# Allegro board BOOM-MCU_01v1.brd
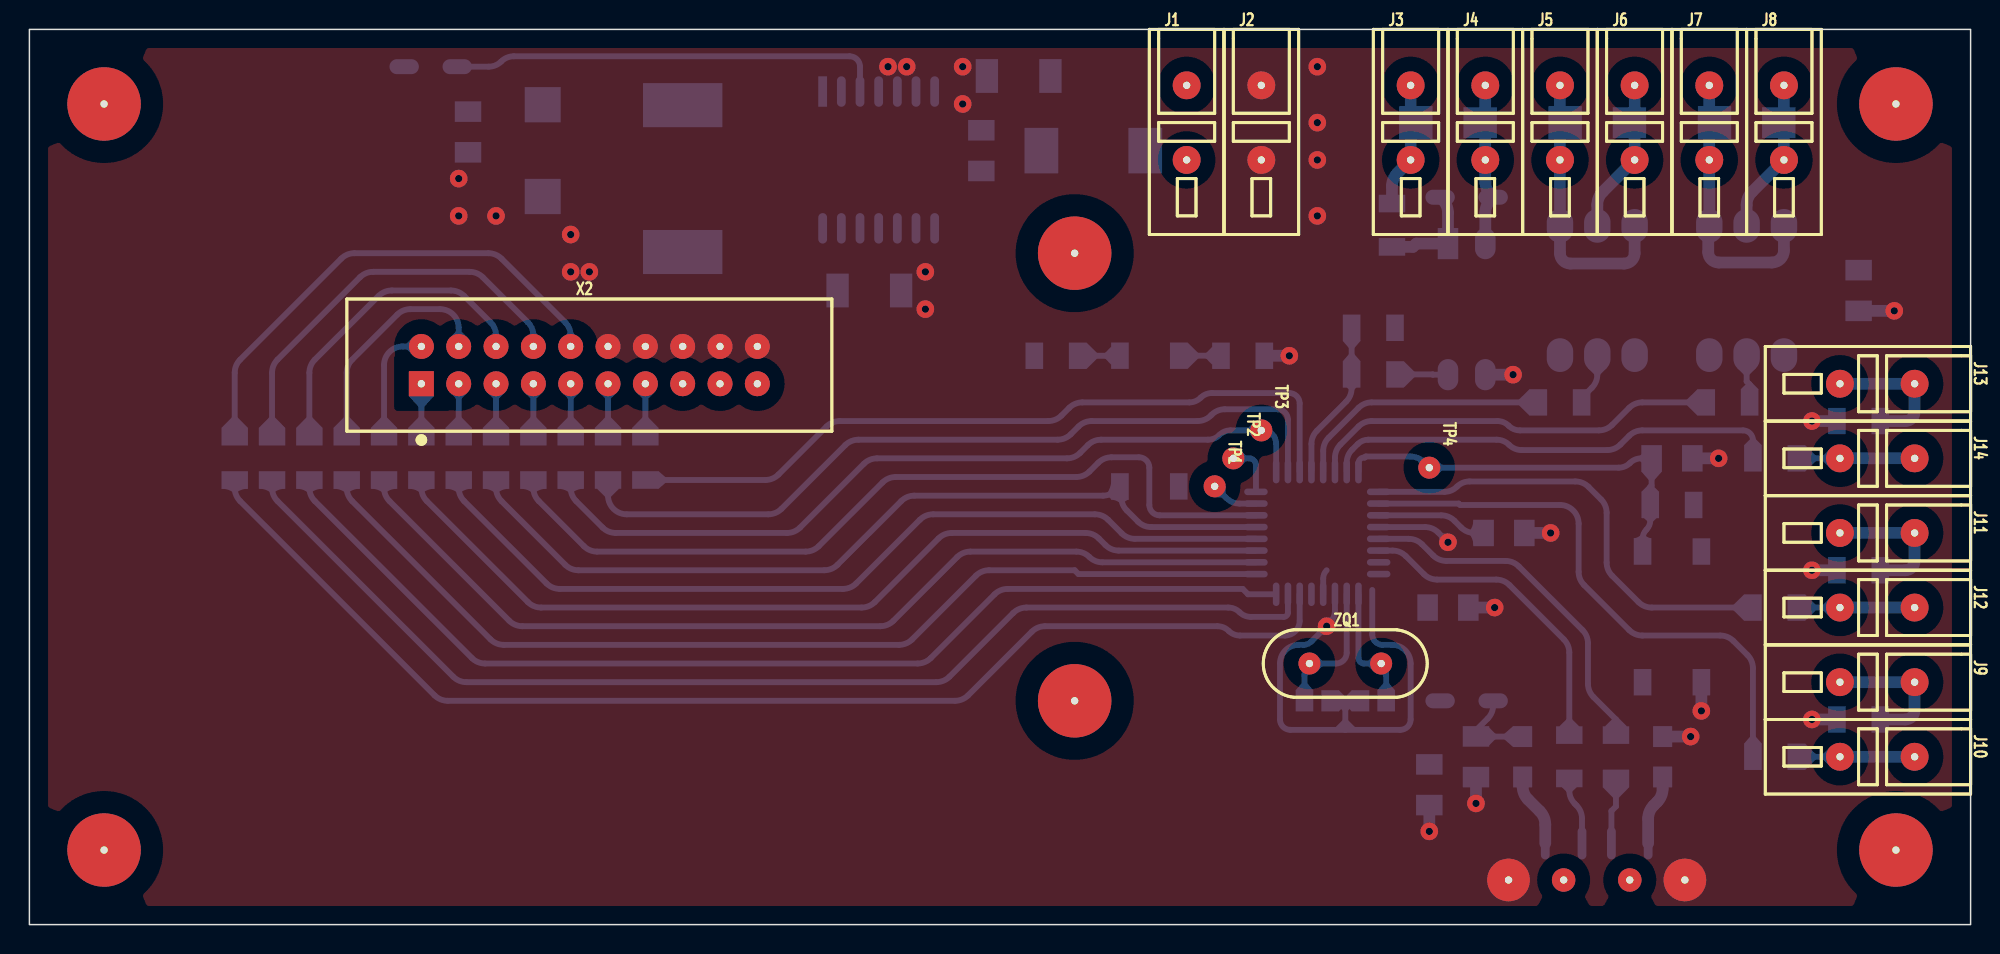
[diagram p0: board, top side]
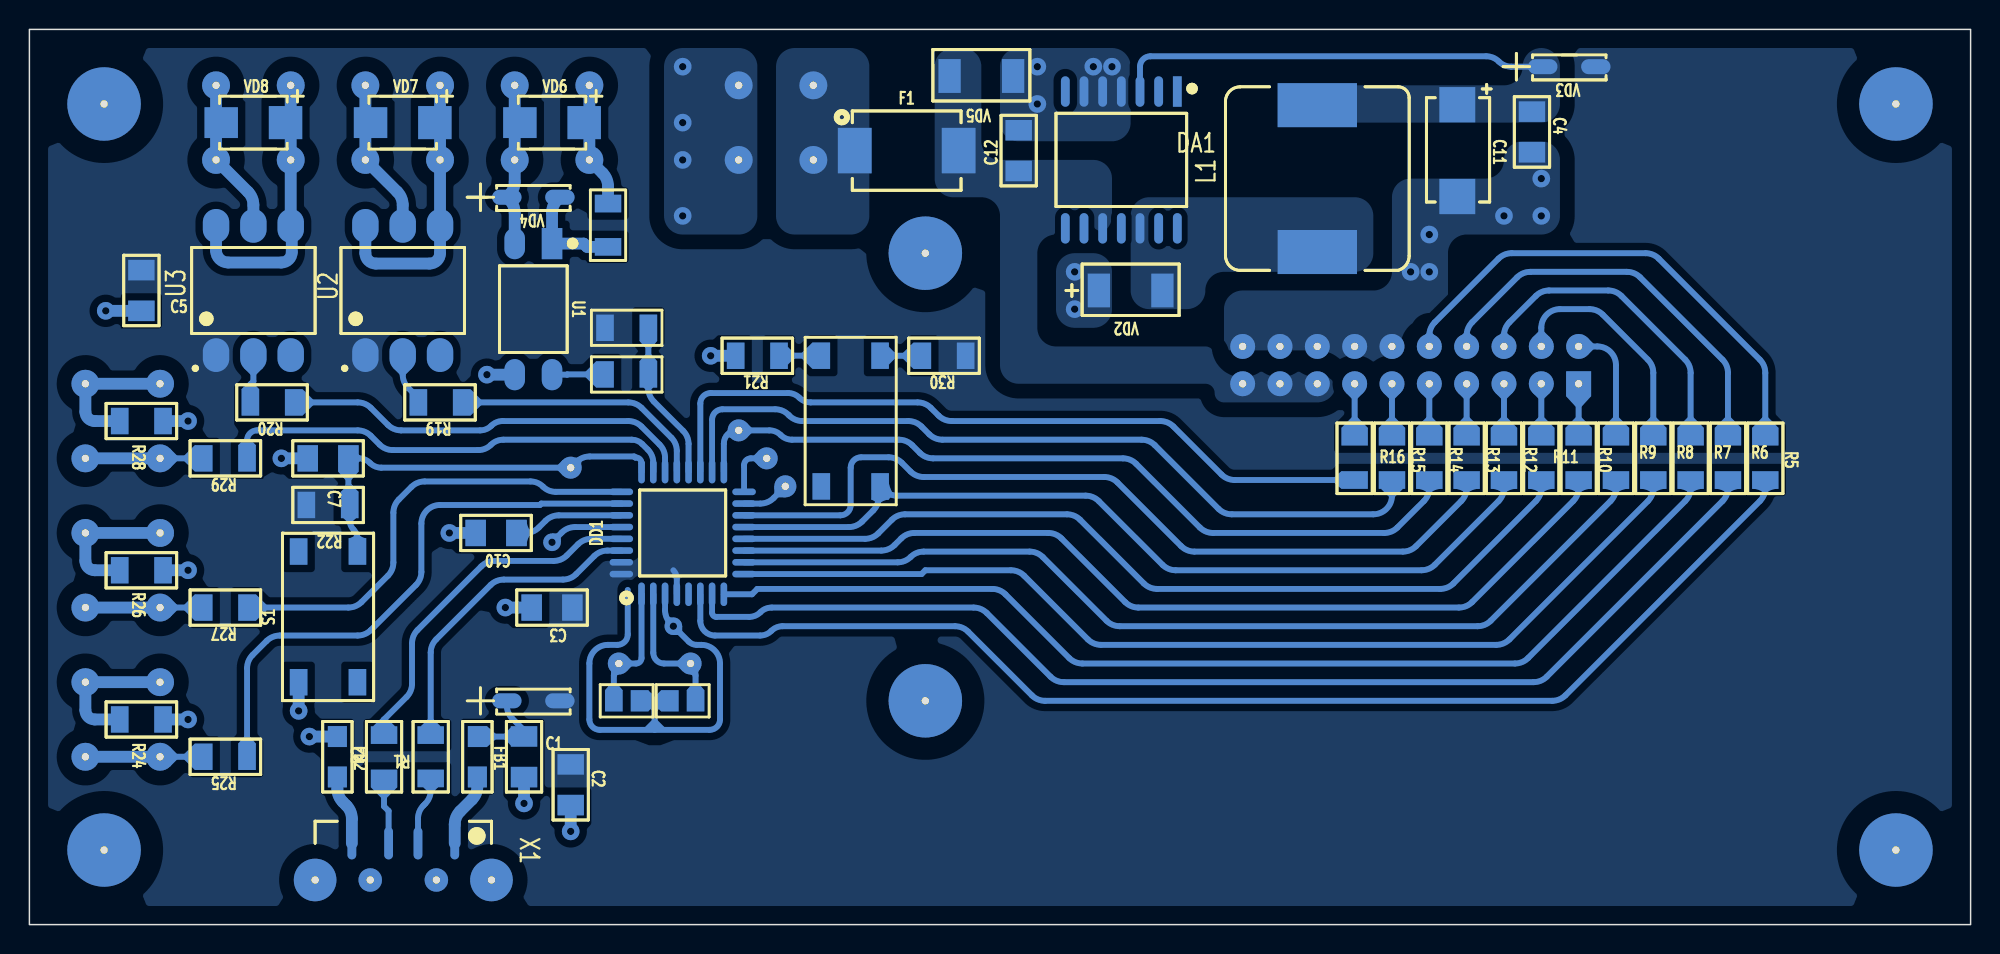
[diagram p1: board, bottom side, seen from below]

Outline 132.08 x 60.96 mm; copper layers: TOP, BOTTOM. Coordinates in mm from the lower left corner of the outline.
Outline path: rectangle 0,0 132.08,60.96

## Placement (name value [footprint] x y rotation side)
C1  0.1uF  [CAPC3216X110N]  98.43 11.43 270 bottom
C2  10uF  [CAPC3216X110N]  95.25 9.53 270 bottom
C3  0.1uF  [CAPC3216X110N]  96.52 21.59 0 bottom
C4  0.1uF  [CAPC3216X110N]  29.85 53.98 270 bottom
C5  0.1uF  [CAPC3216X110N]  124.46 43.18 270 bottom
C7  0.1uF  [CAPC3216X110N]  111.76 31.75 0 bottom
C8  22pF  [CAPC2012X130N]  87.63 15.24 0 bottom
C9  22pF  [CAPC2012X130N]  91.44 15.24 180 bottom
C10  1uF  [CAPC3216X110N]  100.33 26.67 0 bottom
C11  220uF x 10B  [CAPMP7343X400N]  34.93 52.7 270 bottom
C12  1uF  [CAPC3216X110N]  64.77 52.7 90 bottom
DA1  LM2574M-5.0  [SOIC127P1032X265-14N]  58.42 52.07 270 bottom
DD1  AT90USB162-16AU  [QFP80P900X900X120-32N]  87.63 26.67 90 bottom
F1  MF-SM75/60  [FUSM7354X320N]  72.39 52.7 180 bottom
FB1  BLM31PG601SN1  [INDC3211X160N]  101.6 11.43 270 bottom
FB2  BLM31PG601SN1  [INDC3211X160N]  111.12 11.43 270 bottom
J1  WAGO236-744  [WAGO_236]  78.74 57.15 0 top
J2  WAGO236-401  [WAGO_236]  83.82 57.15 0 top
J3  WAGO236-401  [WAGO_236]  93.98 57.15 0 top
J4  WAGO236-401  [WAGO_236]  99.06 57.15 0 top
J5  WAGO236-401  [WAGO_236]  104.14 57.15 0 top
J6  WAGO236-401  [WAGO_236]  109.22 57.15 0 top
J7  WAGO236-401  [WAGO_236]  114.3 57.15 0 top
J8  WAGO236-401  [WAGO_236]  119.38 57.15 0 top
J9  WAGO236-401  [WAGO_236]  128.27 16.51 270 top
J10  WAGO236-401  [WAGO_236]  128.27 11.43 270 top
J11  WAGO236-401  [WAGO_236]  128.27 26.67 270 top
J12  WAGO236-401  [WAGO_236]  128.27 21.59 270 top
J13  WAGO236-401  [WAGO_236]  128.27 36.83 270 top
J14  WAGO236-401  [WAGO_236]  128.27 31.75 270 top
L1  330uH 0.95A  [INDC12501250X800N]  44.45 50.8 90 bottom
NOREF  -  [unnamed]  5.08 5.08 0 top
NOREF#2  -  [unnamed]  127 55.88 0 top
NOREF#3  -  [unnamed]  71.12 15.24 0 top
NOREF#4  -  [unnamed]  71.12 45.72 0 top
NOREF#5  -  [unnamed]  5.08 55.88 0 top
NOREF#6  -  [unnamed]  127 5.08 0 top
R1  24  [RESC3216X50N]  104.78 11.43 90 bottom
R2  24  [RESC3216X50N]  107.95 11.43 90 bottom
R5  100  [RESC3216X50N]  13.97 31.75 270 bottom
R6  100  [RESC3216X50N]  16.51 31.75 270 bottom
R7  100  [RESC3216X50N]  19.05 31.75 270 bottom
R8  100  [RESC3216X50N]  21.59 31.75 270 bottom
R9  100  [RESC3216X50N]  24.13 31.75 270 bottom
R10  100  [RESC3216X50N]  26.67 31.75 270 bottom
R11  100  [RESC3216X50N]  29.21 31.75 270 bottom
R12  100  [RESC3216X50N]  31.75 31.75 270 bottom
R13  100  [RESC3216X50N]  34.29 31.75 270 bottom
R14  100  [RESC3216X50N]  36.83 31.75 270 bottom
R15  100  [RESC3216X50N]  39.37 31.75 270 bottom
R16  100  [RESC3216X50N]  41.91 31.75 270 bottom
R17  1k  [RESC3216X50N]  92.71 47.62 270 bottom
R18  100  [RESC3216X50N]  91.44 37.47 180 bottom
R19  510  [RESC3216X50N]  104.14 35.56 0 bottom
R20  510  [RESC3216X50N]  115.57 35.56 0 bottom
R21  1k  [RESC3216X50N]  82.55 38.73 0 bottom
R22  10k  [RESC3216X50N]  111.76 28.57 0 bottom
R23  10k  [RESC3216X50N]  91.44 40.64 0 bottom
R24  1k  [RESC3216X50N]  124.46 13.97 0 bottom
R25  1k  [RESC3216X50N]  118.75 11.43 0 bottom
R26  1k  [RESC3216X50N]  124.46 24.13 0 bottom
R27  1k  [RESC3216X50N]  118.75 21.59 0 bottom
R28  1k  [RESC3216X50N]  124.46 34.29 0 bottom
R29  1k  [RESC3216X50N]  118.75 31.75 0 bottom
R30  10k  [RESC3216X50N]  69.85 38.73 0 bottom
S1  DTSMW-2.0S  [SW_DTSMW-2_0N]  111.76 20.95 90 bottom
S2  DTSMW-2.0S  [SW_DTSMW-2_0N]  76.2 34.29 90 bottom
TP1  TP  [KP_W150H100]  80.65 29.84 270 top
TP2  TP  [KP_W150H100]  81.92 31.75 270 top
TP3  TP  [KP_W150H100]  83.82 33.66 270 top
TP4  TP  [KP_W150H100]  95.25 31.12 270 top
U1  HCPL-817-300E  [SOIC254P1000X350-4N]  97.79 41.91 270 bottom
U2  G3VM-351E  [SOIC254P978X342-6M]  106.68 43.18 90 bottom
U3  G3VM-351E  [SOIC254P978X342-6M]  116.84 43.18 90 bottom
VD1  MBR0540  [SOT95P375X128-2N]  97.79 15.24 0 bottom
VD2  STPS160U  [DIOM5336X265N]  57.15 43.18 0 bottom
VD3  MBR0540  [SOT95P375X128-2N]  27.31 58.42 0 bottom
VD4  MBR0540  [SOT95P375X128-2N]  97.79 49.53 0 bottom
VD5  SM6T30CA  [DIOM5336X265N_V1]  67.31 57.78 0 bottom
VD6  P6SMB300CA  [DIOM5436X230N]  96.52 54.61 180 bottom
VD7  P6SMB300CA  [DIOM5436X230N]  106.68 54.61 180 bottom
VD8  P6SMB300CA  [DIOM5436X230N]  116.84 54.61 180 bottom
X1  USB A 18 SMT  [CON_USB_A_MALE_SMD]  106.64 6.04 270 bottom
X2  PBD-20  [SHD0S254P10X2_3300X900X900]  26.67 36.83 0 top
ZQ1  16000kHz  [OSCW43P488L1100H350Q2]  89.54 17.78 0 top

## Library data of the parts
C1-C5 C7-C10 C12 = CAPACITOR
C11 = CAPACITOR_POL
DA1 = LM2574HVM-5_0.0
DD1 = AT90USB162_6
F1 = EFUSE
FB1 FB2 L1 = INDUCTOR
J1-J14 = CONN2_1
R1 R2 R5-R30 = R_0.25W
S1 S2 = SW_PUSHBTN
TP1-TP4 = TP
U1 = HCPL181_v1_0
U2 U3 = PVT412_0
VD1-VD4 = SHOTTKY
VD5-VD8 = SUPRESSOR
X1 = USB A 18 SMT_0
X2 = CONN20_12
ZQ1 = XTAL

## Footprints (pads in the part's own frame, mm; a bottom-side part is the same pattern mirrored in y, then rotated)
CAPC2012X130N
  rect 1.2x1.45 smd: 1(-0.875,0) 2(0.875,0)
CAPC3216X110N
  rect 1.4x1.8 smd: 1(-1.385,0) 2(1.385,0)
CAPMP7343X400N
  rect 2.4x2.45 smd: 1(-3.125,0) 2(3.125,0)
CON_USB_A_MALE_SMD
  round 1.6 hole 0.5: (3,-2.25) (3,2.25)
  oval 2.2x0.6 smd: 1(0.5,3.5) 2(0.5,1) 3(0.5,-1) 4(0.5,-3.5)
  round 2.9 hole 0.5: 5(3,-6) 6(3,6)
DIOM5336X265N
  rect 1.52x2.3 smd: 1(-2.162,0) 2(2.162,0)
DIOM5336X265N_V1
  rect 1.52x2.3 smd: 1(-2.162,0) 2(2.162,0)
DIOM5436X230N
  rect 2.275x2.1 smd: 1(-2.188,0)
  rect 2.275x2.25 smd: 2(2.188,0)
FUSM7354X320N
  rect 2.3x3.1 smd: 1(-3.535,0) 2(3.535,0)
INDC3211X160N
  rect 1.425x1.3 smd: 1(-1.375,0) 2(1.375,0)
INDC12501250X800N
  rect 3x5.4 smd: 1(-5,0) 2(5,0)
KP_W150H100
  round 1.5 hole 0.5: 1(0,0)
OSCW43P488L1100H350Q2
  round 1.5 hole 0.5: 1(-2.44,0) 2(2.44,0)
QFP80P900X900X120-32N
  oval 1.6x0.45 smd: 1(-4.175,2.8) 2(-4.175,2) 3(-4.175,1.2) 4(-4.175,0.4) 5(-4.175,-0.4) 6(-4.175,-1.2) 7(-4.175,-2) 8(-4.175,-2.8) 17(4.175,-2.8) 18(4.175,-2) 19(4.175,-1.2) 20(4.175,-0.4) 21(4.175,0.4) 22(4.175,1.2) 23(4.175,2) 24(4.175,2.8)
  oval 0.45x1.6 smd: 9(-2.8,-4.175) 10(-2,-4.175) 11(-1.2,-4.175) 12(-0.4,-4.175) 13(0.4,-4.175) 14(1.2,-4.175) 15(2,-4.175) 16(2.8,-4.175) 25(2.8,4.175) 26(2,4.175) 27(1.2,4.175) 28(0.4,4.175) 29(-0.4,4.175) 30(-1.2,4.175) 31(-2,4.175) 32(-2.8,4.175)
RESC3216X50N
  rect 1.2x1.8 smd: 1(-1.475,0) 2(1.475,0)
SHD0S254P10X2_3300X900X900
  rect 1.7x1.7 hole 0.5: 1(0,0)
  round 1.7 hole 0.5: 2(0,2.54) 3(2.54,0) 4(2.54,2.54) 5(5.08,0) 6(5.08,2.54) 7(7.62,0) 8(7.62,2.54) 9(10.16,0) 10(10.16,2.54) 11(12.7,0) 12(12.7,2.54) 13(15.24,0) 14(15.24,2.54) 15(17.78,0) 16(17.78,2.54) 17(20.32,0) 18(20.32,2.54) 19(22.86,0) 20(22.86,2.54)
SOIC127P1032X265-14N
  rect 2.075x0.6 smd: 1(-4.658,4.445)
  oval 2.075x0.6 smd: 2(-4.658,3.175) 3(-4.658,1.905) 4(-4.658,0.635) 5(-4.658,-0.635) 6(-4.658,-1.905) 7(-4.658,-3.175) 8(4.658,-3.175) 9(4.658,-1.905) 10(4.658,-0.635) 11(4.658,0.635) 12(4.658,1.905) 13(4.658,3.175) 14(4.658,4.445)
SOIC254P978X342-6M
  oval 2.3x1.8 smd: 1(-4.4,2.54) 2(-4.4,0) 3(-4.4,-2.54) 4(4.4,-2.54) 5(4.4,0) 6(4.4,2.54)
SOIC254P1000X350-4N
  rect 2.125x1.4 smd: 1(-4.462,1.27)
  oval 2.125x1.4 smd: 2(-4.462,-1.27) 3(4.462,-1.27) 4(4.462,1.27)
SOT95P375X128-2N
  oval 2x1.02 smd: 1(-1.805,0) 2(1.805,0)
SW_DTSMW-2_0N
  rect 1.8x1.2 smd: 1(-4.45,-2) 2(4.45,-2) 3(4.45,2) 4(-4.45,2)
unnamed
  round 5 hole 0.5: 1(0,0)
WAGO_236
  round 1.9 hole 0.5: 1(0,0) 2(0,-5.08)

## Nets
GND: C1.2 C2.2 C3.2 C4.2 C5.2 C7.2 C8.2 C9.2 C10.2 C11.2 C12.2 DA1.4(SGND) DA1.5(O\N\/OFF) DA1.6(PGND) DD1.3(GND) DD1.28(UGND) FB2.1 J2.1(PIN1) J2.2(PIN2) R21.2 R24.1 R26.1 R28.1 S1.4 U1.3(EMITTER) VD2.2(ANODE) VD5.1(ANODE) X1.5(SHLD) X1.6(SHLD1) X2.12(GND#12) X2.14(GND#14) X2.16(GND#16) X2.18(GND#18) X2.20(GND#20)
#RES: C7.1 DD1.24(R\E\S\E\T\/PC1/DW) R22.1 S1.2 TP4.1
+5B: C2.1 C3.1 C5.1 DD1.4(VCC) DD1.31(UVCC) DD1.32(AVCC) R22.2 R23.2 R30.1 U2.1(ANODE) U3.1(ANODE) VD1.1(CATHODE) VD3.1(CATHODE)
+5B_USB: C1.1 FB1.1 VD1.2(ANODE)
+12B: C12.1 DA1.10(VIN) F1.2 VD5.2(CATHODE) X2.15(+12B#15) X2.17(+12B#17) X2.19(+12B#19)
A: DD1.8(RXD1/AIN1/INT2/PD2) R7.2
B: DD1.7(AIN0/INT1/PD1) R6.2
BOOM: DD1.21(PB7/PCINT7/OC.0A/OC.1C) R19.1
C: DD1.13(\C\T\S\/\H\W\B\/T0/INT7/PD7) R12.2 S2.1
D: DD1.12(\R\T\S\/INT6/PD6) R11.2
D+: DD1.29(D+/SCK) R2.2
D-: DD1.30(D-/SDATA) R1.2
DEFUSE: DD1.22(PC7/INT4/ICP1/CLKO) R20.1
DIG1: DD1.14(\S\S\/PCINT0/PB0) R13.2
DIG3: DD1.18(PB4/T1/PCINT4) R15.2
DIG4: DD1.19(PB5/PCINT5) R16.2
DP: DD1.6(OC.0B/INT0/PD0) R5.2
E: DD1.11(XCK/PCINT12/PD5) R10.2
F: DD1.9(TXD1/INT3/PD3) R8.2
G: DD1.10(INT5/PD4) R9.2
MISO/DIG2: DD1.17(PB3/PDO/MISO/PCINT3) R14.2 TP3.1
MOSI: DD1.15(SCLK/PCINT1/PB1) TP1.1
SCLK: DD1.16(PDI/MOSI/PCINT2/PB2) TP2.1
START: DD1.20(PB6/PCINT6) R18.2 R23.1
WIRE1: DD1.26(PC4/PCINT10) R25.1
WIRE2: DD1.25(PC5/PCINT9/OC.1B) R27.1
WIRE3: DD1.23(PC6/OC.1A/PCINT8) R29.1
N439682: FB2.2 X1.4(GND)
N439688: FB1.2 X1.1(VBUS)
N439904: R2.1 X1.3(D+)
N439914: R1.1 X1.2(D-)
N441096: C10.1 DD1.27(UCAP)
N443077: R12.1 X2.5(C)
N443081: R11.1 X2.3(D)
N443094: R10.1 X2.1(E)
N443107: R9.1 X2.2(G)
N443119: R8.1 X2.4(F)
N443131: R7.1 X2.6(A)
N443143: R6.1 X2.8(B)
N444919: R5.1 X2.10(DP)
N445591: R16.1 X2.13(DIG4)
N445610: R15.1 X2.11(DIG3)
N445622: R14.1 X2.9(DIG2)
N446825: C4.1 C11.1 DA1.3(FB) L1.2 VD3.2(ANODE)
N447843: DA1.12(VOUT) L1.1 VD2.1(CATHODE)
N450977: R17.2 U1.1(ANODE) VD4.1(CATHODE)
N451042: J4.1(PIN1) J4.2(PIN2) U1.2(CATHODE) VD4.2(ANODE) VD6.1(ANODE)
N451474: J3.1(PIN1) J3.2(PIN2) R17.1 VD6.2(CATHODE)
N451518: R18.1 U1.4(COLLECTOR)
N452612: J8.1(PIN1) J8.2(PIN2) U3.5(SOURCE) VD8.1(ANODE)
N452841: R20.2 U3.2(CATHODE)
N462128: J9.1(PIN1) J9.2(PIN2) R24.2
N462776: J11.1(PIN1) J11.2(PIN2) R26.2
N462976: J13.1(PIN1) J13.2(PIN2) R28.2
N464057: J10.1(PIN1) J10.2(PIN2) R25.2
N464124: J12.1(PIN1) J12.2(PIN2) R27.2
N464128: J14.1(PIN1) J14.2(PIN2) R29.2
N467678: R30.2 S2.2
N467714: R21.1 S2.3
N470630: C9.1 DD1.1(XTAL1) ZQ1.2
N470646: C8.1 DD1.2(PC0/XTAL2) ZQ1.1
N473598: R13.1 X2.7(DIG1)
N475101: J5.1(PIN1) J5.2(PIN2) U2.4(DRAIN1) U2.6(DRAIN2) VD7.2(CATHODE)
N475105: J6.1(PIN1) J6.2(PIN2) U2.5(SOURCE) VD7.1(ANODE)
N475141: R19.2 U2.2(CATHODE)
N479390: F1.1 J1.1(PIN1) J1.2(PIN2)
N481359: J7.1(PIN1) J7.2(PIN2) U3.4(DRAIN1) U3.6(DRAIN2) VD8.2(CATHODE)

Pads without a net: DA1 1 2 7 8 9 11 13 14; DD1 5; NOREF 1; NOREF#2 1; NOREF#3 1; NOREF#4 1; NOREF#5 1; NOREF#6 1; S1 1 3; S2 4; U2 3; U3 3

## Via types
v1: diameter 1.2, hole 0.5, TOP to BOTTOM, 31 vias

## Routing (per net, layer and track width the routed paths; a pad name or vN(x,y) marks a point on that pad's centre or on a via; arc(x,y) is an arc through that point)
GND: length 63.9
  BOTTOM w0.4: 91.37,22.79 91.37,19.76 arc(91.58,19.26) 92.08,19.05 92.71,19.05 arc(93.61,18.68) 93.98,17.78 93.98,13.97 arc(93.77,13.47) 93.27,13.26 89.54,13.26 ; 89.54,13.26 85.8,13.26 arc(85.3,13.47) 85.09,13.97 85.09,17.78 arc(85.46,18.68) 86.36,19.05 86.68,19.05 arc(86.97,19.11) 87.22,19.27 v1(88.27,20.32) 88.46,20.51 arc(88.73,20.92) 88.83,21.41 DD1.3 ; 89.54,13.26 89.54,15.24 ; C8.2 89.54,15.24 ; 89.54,15.24 C9.2 ; v1(96.52,26.04) 95.86,26.7 arc(95.45,26.97) 94.96,27.07 DD1.28
  BOTTOM w0.8: S1.4 v1(113.76,14.55) ; C2.2 v1(95.25,6.35) ; R26.1 v1(121.28,24.13) ; U1.3 v1(100.95,37.45) ; C10.2 v1(103.51,26.67) ; FB2.1 v1(113.03,12.8) ; 97.91,21.59 v1(99.7,21.59) ; 84.03,38.73 v1(85.73,38.73) ; R24.1 v1(121.28,13.97) ; R28.1 v1(121.28,34.29) ; C1.2 v1(98.43,8.25) ; C5.2 v1(126.89,41.8) ; C7.2 v1(114.94,31.75)
  vias: v1(29.21,50.8) v1(29.21,48.26) v1(31.75,48.26) v1(36.83,46.99) v1(36.83,44.45) v1(38.1,44.45) v1(58.42,58.42) v1(59.69,58.42) v1(60.96,44.45) v1(60.96,41.91) v1(63.5,58.42) v1(63.5,55.88) v1(87.63,58.42) v1(87.63,54.61) v1(87.63,52.07) v1(87.63,48.26)
#RES: length 27.7
  BOTTOM w0.4: DD1.24 90.43,31.42 arc(90.54,31.7) 90.82,31.81 90.87,31.81 90.93,31.88 93.96,31.88 arc(94.45,31.78) 94.86,31.5 TP4.1 108.14,31.12 arc(108.55,31.2) 108.9,31.43 arc(109.25,31.67) 109.67,31.75 C7.1 110.38,29.89 110.28,29.8 R22.1 110.28,27.53 arc(110.22,27.18) 110.02,26.89 arc(109.83,26.6) 109.76,26.26 S1.2
+5B: length 1.7
  BOTTOM w0.4: DD1.4 88.03,23.56 arc(88.09,23.87) 88.27,24.13
+5B_USB: length 6
  BOTTOM w0.4: FB1.1 99.66,12.8 99.65,12.82 C1.1 98.43,13.23 99.22,14.03 arc(99.5,14.44) 99.59,14.93 VD1.2
A: length 73.6
  BOTTOM w0.4: DD1.8 82.92,22.5 82.55,22.86 66.57,22.86 arc(66.08,22.76) 65.67,22.49 61.33,18.15 arc(60.92,17.88) 60.43,17.78 31.01,17.78 arc(30.52,17.88) 30.11,18.15 19.42,28.84 arc(19.15,29.25) 19.05,29.74 19.05,30.28
B: length 78.9
  BOTTOM w0.4: DD1.7 85.63,21.25 arc(85.55,21.04) 85.34,20.95 83.11,20.95 arc(82.69,21.04) 82.34,21.27 arc(81.99,21.51) 81.58,21.59 67.84,21.59 arc(67.35,21.49) 66.94,21.22 62.6,16.88 arc(62.19,16.61) 61.7,16.51 29.74,16.51 arc(29.25,16.61) 28.84,16.88 16.88,28.84 arc(16.61,29.25) 16.51,29.74 16.51,30.28
BOOM: length 17.6
  BOTTOM w0.4: R19.1 91.33,35.56 arc(90.85,35.46) 90.43,35.19 88.4,33.16 arc(88.13,32.75) 88.03,32.26 DD1.21
C: length 58.7
  BOTTOM w0.4: DD1.13 76.33,27.07 arc(75.84,27.17) 75.43,27.44 74.67,28.2 arc(74.39,28.61) 74.3,29.1 74.3,29.75 S2.1 73.94,29.58 arc(73.53,29.31) 73.04,29.21 60.22,29.21 arc(59.73,29.11) 59.32,28.84 54.98,24.5 arc(54.57,24.23) 54.08,24.13 37.36,24.13 arc(36.87,24.23) 36.46,24.5 32.12,28.84 arc(31.85,29.25) 31.75,29.74 31.75,30.28
D: length 60.4
  BOTTOM w0.4: DD1.12 75.22,26.27 arc(74.73,26.37) 74.32,26.64 73.4,27.57 arc(72.98,27.84) 72.5,27.94 61.49,27.94 arc(61,27.84) 60.59,27.57 56.25,23.23 arc(55.84,22.96) 55.35,22.86 36.09,22.86 arc(35.6,22.96) 35.19,23.23 29.58,28.84 arc(29.31,29.25) 29.21,29.74 29.21,30.28
D+: length 24.3
  BOTTOM w0.4: DD1.29 93.85,26.27 arc(94.34,26.17) 94.75,25.9 95.51,25.14 arc(95.92,24.86) 96.41,24.77 100.44,24.77 arc(100.92,24.67) 101.34,24.39 105.67,20.06 arc(105.95,19.65) 106.05,19.16 106.05,16.4 arc(106.14,15.92) 106.42,15.5 107.95,13.97 R2.2
D-: length 21.6
  BOTTOM w0.4: R1.2 104.78,18.52 arc(104.68,19.01) 104.4,19.42 100.7,23.12 arc(100.29,23.4) 99.8,23.5 95.78,23.5 arc(95.29,23.59) 94.88,23.87 93.65,25.1 arc(93.23,25.37) 92.75,25.47 DD1.30
DEFUSE: length 28.3
  BOTTOM w0.4: DD1.22 88.83,31.79 arc(88.93,32.28) 89.2,32.69 90.43,33.92 arc(90.85,34.19) 91.33,34.29 99.88,34.29 arc(100.3,34.21) 100.65,33.97 arc(101,33.74) 101.41,33.66 106.79,33.66 arc(107.28,33.75) 107.69,34.03 108.85,35.19 arc(109.26,35.46) 109.75,35.56 R20.1
DIG1: length 57.5
  BOTTOM w0.4: DD1.14 76.91,27.87 arc(76.41,28.08) 76.2,28.57 76.2,31.12 arc(75.99,31.61) 75.49,31.82 73.62,31.82 arc(73.14,31.73) 72.73,31.45 72.13,30.85 arc(71.72,30.58) 71.23,30.48 58.95,30.48 arc(58.46,30.38) 58.05,30.11 53.71,25.77 arc(53.3,25.5) 52.81,25.4 38.63,25.4 arc(38.14,25.5) 37.73,25.77 34.66,28.84 arc(34.39,29.25) 34.29,29.74 34.29,30.28
DIG3: length 54.6
  BOTTOM w0.4: 39.37,30.28 39.37,29.21 arc(39.74,28.31) 40.64,27.94 50.27,27.94 arc(50.76,28.04) 51.17,28.31 55.51,32.65 arc(55.92,32.92) 56.41,33.02 69.96,33.02 arc(70.44,33.12) 70.86,33.39 71.38,33.92 arc(71.79,34.19) 72.28,34.29 79.48,34.29 arc(79.97,34.39) 80.38,34.66 80.44,34.72 arc(80.85,35) 81.34,35.09 84.92,35.09 arc(85.42,34.88) 85.63,34.38 DD1.18
DIG4: length 51.7
  BOTTOM w0.4: 41.91,30.28 50.07,30.28 arc(50.55,30.37) 50.97,30.65 54.24,33.92 arc(54.65,34.19) 55.14,34.29 69.32,34.29 arc(69.81,34.39) 70.22,34.66 70.75,35.19 arc(71.16,35.46) 71.65,35.56 78.92,35.56 arc(79.34,35.64) 79.69,35.88 arc(80.05,36.11) 80.46,36.2 85.72,36.2 arc(86.22,35.99) 86.43,35.49 DD1.19
DP: length 83.7
  BOTTOM w0.4: 13.97,30.28 13.97,29.74 arc(14.07,29.25) 14.34,28.84 27.57,15.61 arc(27.98,15.34) 28.47,15.24 62.97,15.24 arc(63.46,15.34) 63.87,15.61 68.21,19.95 arc(68.62,20.22) 69.11,20.32 80.83,20.32 arc(81.25,20.24) 81.6,20 arc(81.95,19.77) 82.36,19.69 85.43,19.69 arc(86.14,19.98) 86.43,20.69 DD1.6
E: length 63.3
  BOTTOM w0.4: DD1.11 74.12,25.47 arc(73.63,25.57) 73.22,25.84 72.76,26.3 arc(72.35,26.57) 71.86,26.67 62.76,26.67 arc(62.27,26.57) 61.86,26.3 57.52,21.96 arc(57.11,21.69) 56.62,21.59 34.82,21.59 arc(34.33,21.69) 33.92,21.96 27.04,28.84 arc(26.77,29.25) 26.67,29.74 26.67,30.28
F: length 69.1
  BOTTOM w0.4: 21.59,30.28 21.59,29.74 arc(21.69,29.25) 21.96,28.84 31.38,19.42 arc(31.79,19.15) 32.28,19.05 59.16,19.05 arc(59.65,19.15) 60.06,19.42 64.4,23.76 arc(64.81,24.03) 65.3,24.13 71.12,24.13 71.38,23.87 DD1.9
G: length 66.2
  BOTTOM w0.4: 24.13,30.28 24.13,29.74 arc(24.23,29.25) 24.5,28.84 32.65,20.69 arc(33.06,20.42) 33.55,20.32 57.89,20.32 arc(58.38,20.42) 58.79,20.69 63.13,25.03 arc(63.54,25.3) 64.03,25.4 71.24,25.4 arc(71.72,25.31) 72.12,25.04 arc(72.52,24.76) 73,24.67 DD1.10
MISO/DIG2: length 55
  BOTTOM w0.4: DD1.17 84.83,32.76 arc(84.57,33.39) 83.94,33.66 TP3.1 81.73,33.66 arc(81.31,33.57) 80.96,33.34 arc(80.61,33.1) 80.2,33.02 72.92,33.02 arc(72.43,32.92) 72.02,32.65 71.49,32.12 arc(71.08,31.85) 70.59,31.75 57.68,31.75 arc(57.19,31.65) 56.78,31.38 52.44,27.04 arc(52.03,26.77) 51.54,26.67 39.9,26.67 arc(39.41,26.77) 39,27.04 37.2,28.84 arc(36.93,29.25) 36.83,29.74 36.83,30.28
MOSI: length 3.2
  BOTTOM w0.4: TP1.1 81.45,29.04 arc(81.86,28.77) 82.35,28.67 DD1.15
SCLK: length 3.6
  BOTTOM w0.4: DD1.16 83.46,31.29 arc(83.32,31.61) 82.99,31.75 TP2.1
START: length 10.8
  BOTTOM w0.4: DD1.20 87.23,32.73 arc(87.33,33.21) 87.6,33.63 89.59,35.62 arc(89.87,36.03) 89.97,36.52 R18.2 R23.1
WIRE1: length 38.7
  BOTTOM w0.4: DD1.26 97.25,28.67 97.34,28.57 104.14,28.57 arc(105.04,28.2) 105.41,27.3 105.41,24.02 arc(105.51,23.54) 105.78,23.12 108.85,20.06 arc(109.26,19.78) 109.75,19.69 115.04,19.69 arc(115.53,19.59) 115.94,19.31 116.9,18.36 arc(117.17,17.95) 117.27,17.46 R25.1
WIRE2: length 31.6
  BOTTOM w0.4: R27.1 110.38,21.59 arc(109.89,21.69) 109.48,21.96 107.69,23.76 arc(107.41,24.17) 107.31,24.66 107.31,28.05 arc(107.22,28.54) 106.94,28.95 106.09,29.8 arc(105.67,30.08) 105.19,30.18 97.99,30.18 arc(97.53,30.09) 97.13,29.82 arc(96.74,29.56) 96.28,29.47 DD1.25
WIRE3: length 31.4
  BOTTOM w0.4: DD1.23 89.63,31.45 arc(89.73,31.93) 90,32.34 90.39,32.73 arc(90.71,32.94) 91.09,33.02 99.83,33.02 arc(100.29,32.93) 100.68,32.67 arc(101.08,32.4) 101.54,32.31 107.35,32.31 arc(107.84,32.41) 108.25,32.69 108.85,33.28 arc(109.26,33.56) 109.75,33.66 116.59,33.66 arc(117.07,33.46) 117.27,32.98 R29.1
N439682: length 4.8
  BOTTOM w0.8: FB2.2 111.12,9.25 arc(111.03,8.76) 110.75,8.35 110.51,8.11 arc(110.24,7.7) 110.14,7.21 X1.4
N439688: length 5
  BOTTOM w0.8: X1.1 103.14,6.82 arc(103.04,7.31) 102.77,7.72 101.97,8.52 arc(101.7,8.93) 101.6,9.42 FB1.2
N439904: length 4.5
  BOTTOM w0.4: X1.3 107.64,7.74 107.95,8.05 107.95,9.96
N439914: length 4.7
  BOTTOM w0.4: X1.2 105.64,7.21 arc(105.54,7.7) 105.27,8.11 105.15,8.23 arc(104.87,8.64) 104.78,9.13 104.78,9.96
N441096: length 7.5
  BOTTOM w0.4: C10.1 98.32,26.67 arc(97.83,26.77) 97.42,27.04 96.96,27.5 arc(96.55,27.77) 96.06,27.87 DD1.27
N443077: length 3.6
  BOTTOM w0.4: X2.5 R12.1
N443081: length 3.6
  BOTTOM w0.4: X2.3 R11.1
N443094: length 3.6
  BOTTOM w0.4: X2.1 R10.1
N443107: length 8.1
  BOTTOM w0.4: R9.1 24.13,38.1 arc(24.5,39) 25.4,39.37 X2.2
N443119: length 16
  BOTTOM w0.4: X2.4 29.21,40.64 arc(28.84,41.54) 27.94,41.91 25.93,41.91 arc(25.44,41.81) 25.03,41.54 21.96,38.47 arc(21.69,38.06) 21.59,37.57 R8.1
N443131: length 21.8
  BOTTOM w0.4: R7.1 19.05,37.57 arc(19.15,38.06) 19.42,38.47 23.76,42.81 arc(24.17,43.08) 24.66,43.18 28.68,43.18 arc(29.17,43.08) 29.58,42.81 31.38,41.01 arc(31.65,40.6) 31.75,40.11 X2.6
N443143: length 27.9
  BOTTOM w0.4: R6.1 16.51,37.57 arc(16.61,38.06) 16.88,38.47 22.49,44.08 arc(22.9,44.35) 23.39,44.45 29.95,44.45 arc(30.44,44.35) 30.85,44.08 33.92,41.01 arc(34.19,40.6) 34.29,40.11 X2.8
N444919: length 34
  BOTTOM w0.4: X2.10 36.83,40.11 arc(36.73,40.6) 36.46,41.01 32.12,45.35 arc(31.71,45.62) 31.22,45.72 22.12,45.72 arc(21.63,45.62) 21.22,45.35 14.34,38.47 arc(14.07,38.06) 13.97,37.57 R5.1
N445591: length 3.6
  BOTTOM w0.4: X2.13 R16.1
N445610: length 3.6
  BOTTOM w0.4: X2.11 R15.1
N445622: length 3.6
  BOTTOM w0.4: X2.9 R14.1
N446825: length 29.7
  BOTTOM w0.4: DA1.3 56.52,58.42 arc(56.31,58.92) 55.81,59.13 32.96,59.13 arc(32.5,59.04) 32.1,58.77 arc(31.71,58.51) 31.25,58.42 VD3.2
N450977: length 7.2
  BOTTOM w0.8: R17.2 94.14,46.15 94.36,46.37 U1.1 96.52,48.47 arc(96.42,48.96) 96.15,49.37 VD4.1
N451042: length 11.3
  BOTTOM w0.8: J4.1 99.06,55.46 arc(98.97,55) 98.71,54.61 VD6.1 98.71,54.61 arc(98.97,54.22) 99.06,53.76 J4.2 99.06,50.59 arc(99.16,50.1) 99.43,49.69 VD4.2 99.43,49.37 arc(99.16,48.96) 99.06,48.47 U1.2
N451474: length 8.7
  BOTTOM w0.8: J3.1 93.98,55.46 arc(94.07,55) 94.33,54.61 VD6.2 94.33,54.61 arc(94.07,54.22) 93.98,53.76 J3.2 93.08,51.17 arc(92.81,50.76) 92.71,50.27 R17.1
N451518: length 3.6
  BOTTOM w0.4: R18.1 95.48,37.47 95.49,37.45 U1.4
N452612: length 10.8
  BOTTOM w0.8: U3.5 116.84,49 arc(116.94,49.49) 117.21,49.9 J8.2 119.38,53.76 arc(119.29,54.22) 119.03,54.61 VD8.1 119.03,54.61 arc(119.29,55) 119.38,55.46 J8.1
N452841: length 3.3
  BOTTOM w0.4: R20.2 117.05,36.79 116.84,36.99 U3.2
N462128: length 9.7
  BOTTOM w0.8: R24.2 127.64,13.97 arc(128.08,14.16) 128.27,14.61 J9.1 J9.2
N462776: length 9.7
  BOTTOM w0.8: R26.2 127.64,24.13 arc(128.08,24.32) 128.27,24.77 J11.1 J11.2
N462976: length 9.7
  BOTTOM w0.8: R28.2 127.64,34.29 arc(128.08,34.48) 128.27,34.92 J13.1 J13.2
N464057: length 8
  BOTTOM w0.4: J10.2 R25.2
  BOTTOM w0.8: J10.1 J10.2
N464124: length 8
  BOTTOM w0.4: J12.2 R27.2
  BOTTOM w0.8: J12.1 J12.2
N464128: length 8
  BOTTOM w0.4: J14.2 R29.2
  BOTTOM w0.8: J14.1 J14.2
N467678: length 2.9
  BOTTOM w0.4: R30.2 73.27,38.73 73.27,38.74 S2.2
N467714: length 2.9
  BOTTOM w0.4: S2.3 80.14,38.74 80.15,38.73 R21.1
N470630: length 8.7
  BOTTOM w0.4: C9.1 92.31,16.96 arc(92.23,17.4) ZQ1.2 90.81,17.78 arc(90.54,17.89) 90.43,18.16 DD1.1
N470646: length 9.6
  BOTTOM w0.4: C8.1 86.76,16.96 arc(86.84,17.4) ZQ1.1 88.9,17.78 arc(89.42,17.99) 89.63,18.51 DD1.2
N473598: length 3.6
  BOTTOM w0.4: X2.7 R13.1
N475101: length 19.4
  BOTTOM w0.8: J5.1 104.14,55.46 arc(104.23,55) 104.49,54.61 VD7.2 104.49,54.61 arc(104.23,54.22) 104.14,53.76 J5.2 U2.4 104.14,45.72 arc(104.35,45.22) 104.85,45.01 108.51,45.01 arc(109.01,45.22) 109.22,45.72 U2.6
N475105: length 10.8
  BOTTOM w0.8: J6.1 109.22,55.46 arc(109.13,55) 108.87,54.61 VD7.1 108.87,54.61 arc(109.13,54.22) 109.22,53.76 J6.2 107.05,49.9 arc(106.78,49.49) 106.68,49 U2.5
N475141: length 3.6
  BOTTOM w0.4: U2.2 106.68,37.45 arc(106.58,36.96) 106.31,36.55 105.83,36.07 arc(105.67,35.84) R19.2
N481359: length 19.3
  BOTTOM w0.8: U3.6 119.38,45.9 arc(119.14,45.32) 118.56,45.09 114.94,45.09 arc(114.44,45.29) 114.23,45.79 114.23,47.51 U3.4 J7.2 114.3,53.76 arc(114.39,54.22) 114.65,54.61 VD8.2 114.65,54.61 arc(114.39,55) 114.3,55.46 J7.1

## Copper pours and planes (outline as drawn; the poured copper is in the pictures)
GND on TOP: 129.54,1.27 130.44,1.64 130.81,2.54 130.81,58.42 130.44,59.32 129.54,59.69 2.54,59.69 1.64,59.32 1.27,58.42 1.27,2.54 1.64,1.64 2.54,1.27
GND on BOTTOM: 58.42,41.91 58.79,41.01 59.69,40.64 60.96,40.64 61.86,41.01 62.23,41.91 62.23,44.45 61.86,45.35 60.96,45.72 59.69,45.72 58.79,45.35 58.42,44.45
GND on BOTTOM: 58.42,59.69 57.52,59.32 57.15,58.42 57.15,54.61 57.52,53.71 58.42,53.34 64.77,53.34 65.67,53.71 66.04,54.61 66.04,58.42 65.67,59.32 64.77,59.69
GND on BOTTOM: 35.56,45.72 35.19,46.62 34.29,46.99 29.21,46.99 28.31,47.36 27.94,48.26 27.94,52.07 28.31,52.97 29.21,53.34 30.48,53.34 31.38,52.97 32.12,51.17 33.02,50.8 38.1,50.8 39,50.43 39.37,49.53 39.37,44.45 39.74,43.55 40.64,43.18 49.53,43.18 50.43,42.81 50.8,41.91 50.8,39.37 50.43,38.47 49.53,38.1 36.83,38.1 35.93,38.47 35.56,39.37
#RES on BOTTOM (solid shape): 110.19,29.98 110.28,30 110.38,29.98 110.89,29.48 110.28,28.52 109.69,29.48
#RES on BOTTOM (solid shape): 111.08,30.85 110.49,30.19 110.38,30.15 110.26,30.19 109.68,30.85 110.38,31.8
+5B on BOTTOM: 129.54,1.27 130.44,1.64 130.81,2.54 130.81,58.42 130.44,59.32 129.54,59.69 2.54,59.69 1.64,59.32 1.27,58.42 1.27,2.54 1.64,1.64 2.54,1.27 ; 1 cut-out
+5B_USB on BOTTOM (solid shape): 99.83,12.91 99.85,12.82 99.83,12.72 99.32,12.21 98.38,12.82 99.32,13.43
+12B on BOTTOM: 62.23,39.37 63.13,39.74 63.5,40.64 63.5,45.72 63.13,46.62 62.23,46.99 59.69,46.99 58.79,47.36 58.42,48.26 58.42,50.8 58.79,51.7 59.69,52.07 66.04,52.07 66.94,52.44 67.31,53.34 67.31,58.42 67.68,59.32 68.58,59.69 69.22,59.69 70.11,59.32 70.49,58.42 70.49,50.8 70.11,49.9 69.22,49.53 67.31,49.53 66.41,49.16 66.04,48.26 66.04,38.1 65.67,37.2 64.77,36.83 52.07,36.83 51.62,36.64 51.25,35.75 50.8,35.56 44.45,35.56 43.55,35.93 43.18,36.83 43.55,37.73 44.45,38.1 50.8,38.1 51.25,38.29 51.62,39.18 52.07,39.37
BOOM on BOTTOM (solid shape): 102.72,35.56 102.06,34.66 101.27,35.45 101.23,35.56 101.27,35.67 102.06,36.46
DEFUSE on BOTTOM (solid shape): 114.15,35.56 113.5,34.66 112.7,35.45 112.66,35.56 112.7,35.67 113.5,36.46
DIG4 on BOTTOM (solid shape): 43.38,30.39 43.41,30.28 43.38,30.16 42.81,29.68 41.86,30.28 42.81,30.88
START on BOTTOM (solid shape): 89.85,38.93 89.97,38.96 90.08,38.93 90.56,38.37 89.97,37.41 89.37,38.37
START on BOTTOM (solid shape): 90.56,39.74 90.08,39.17 89.97,39.14 89.85,39.17 89.37,39.74 89.97,40.69
WIRE1 on BOTTOM (solid shape): 117.16,12.9 117.27,12.93 117.38,12.9 117.87,12.33 117.27,11.38 116.67,12.33
WIRE2 on BOTTOM (solid shape): 117.32,21.59 116.67,20.69 115.87,21.48 115.84,21.59 115.87,21.7 116.67,22.49
WIRE3 on BOTTOM (solid shape): 117.17,33.15 117.27,33.18 117.37,33.15 117.87,32.65 117.27,31.7 116.67,32.65
N439904 on BOTTOM (solid shape): 108.85,9.36 108.06,8.56 107.95,8.52 107.84,8.56 107.05,9.36 107.95,10
N443077 on BOTTOM (solid shape): 31.64,34.62 31.75,34.66 31.87,34.62 32.65,33.83 31.75,33.17 30.85,33.83
N443081 on BOTTOM (solid shape): 29.1,34.62 29.21,34.66 29.33,34.62 30.11,33.83 29.21,33.17 28.31,33.83
N443094 on BOTTOM (solid shape): 26.56,34.62 26.67,34.66 26.79,34.62 27.57,33.83 26.67,33.17 25.77,33.83
N443094 on BOTTOM (solid shape): 27.52,35.98 26.79,35.19 26.67,35.15 26.55,35.19 25.82,35.98 26.67,36.88
N443107 on BOTTOM (solid shape): 24.02,34.62 24.13,34.66 24.25,34.62 25.03,33.83 24.13,33.17 23.23,33.83
N443119 on BOTTOM (solid shape): 21.48,34.62 21.59,34.66 21.71,34.62 22.49,33.83 21.59,33.17 20.69,33.83
N443131 on BOTTOM (solid shape): 18.94,34.62 19.05,34.66 19.17,34.62 19.95,33.83 19.05,33.17 18.15,33.83
N443143 on BOTTOM (solid shape): 16.4,34.62 16.51,34.66 16.63,34.62 17.41,33.83 16.51,33.17 15.61,33.83
N444919 on BOTTOM (solid shape): 13.86,34.62 13.97,34.66 14.09,34.62 14.87,33.83 13.97,33.17 13.07,33.83
N445591 on BOTTOM (solid shape): 41.8,34.62 41.91,34.66 42.03,34.62 42.81,33.83 41.91,33.17 41.01,33.83
N445610 on BOTTOM (solid shape): 39.26,34.62 39.37,34.66 39.49,34.62 40.27,33.83 39.37,33.17 38.47,33.83
N445622 on BOTTOM (solid shape): 36.72,34.62 36.83,34.66 36.95,34.62 37.73,33.83 36.83,33.17 35.93,33.83
N447843 on BOTTOM: 52.44,42.28 53.34,41.91 55.88,41.91 56.78,42.28 57.15,43.18 57.15,48.26 56.78,49.16 55.88,49.53 41.91,49.53 41.01,49.16 40.64,48.26 40.64,45.72 41.01,44.82 41.91,44.45 50.8,44.45 51.7,44.08
N451518 on BOTTOM (solid shape): 94.31,37.58 94.35,37.47 94.31,37.35 93.52,36.56 92.87,37.47 93.52,38.37
N452841 on BOTTOM (solid shape): 116.95,36.96 117.05,36.99 117.14,36.96 117.65,36.46 117.05,35.51 116.45,36.46
N452841 on BOTTOM (solid shape): 117.48,37.89 116.98,37.4 116.84,37.34 116.7,37.4 116.2,37.89 116.84,38.83
N464057 on BOTTOM (solid shape): 121.62,11.55 121.65,11.43 121.62,11.32 120.82,10.53 120.17,11.43 120.82,12.33
N464124 on BOTTOM (solid shape): 121.62,21.7 121.65,21.59 121.62,21.48 120.82,20.69 120.17,21.59 120.82,22.49
N464128 on BOTTOM (solid shape): 121.62,31.87 121.65,31.75 121.62,31.64 120.82,30.85 120.17,31.75 120.82,32.65
N467678 on BOTTOM (solid shape): 72.72,38.85 72.76,38.73 72.72,38.62 71.93,37.84 71.28,38.73 71.93,39.63
N467714 on BOTTOM (solid shape): 79.6,38.86 79.63,38.74 79.6,38.62 78.8,37.84 78.15,38.74 78.8,39.64
N473598 on BOTTOM (solid shape): 34.18,34.62 34.29,34.66 34.41,34.62 35.19,33.83 34.29,33.17 33.39,33.83
N475141 on BOTTOM (solid shape): 107.32,37.89 106.82,37.4 106.68,37.34 106.54,37.4 106.04,37.89 106.68,38.83
GND on BOTTOM (solid shape): 89.71,15.34 89.74,15.24 89.71,15.14 89.1,14.53 88.46,15.24 89.1,15.95
GND on BOTTOM (solid shape): 90.62,15.24 89.97,14.53 89.36,15.14 89.33,15.24 89.36,15.34 89.97,15.95
GND on BOTTOM (solid shape): 89.39,13.97 89.54,14.03 89.68,13.97 90.24,13.4 89.74,13.21 89.34,13.21 88.83,13.4
GND on BOTTOM (solid shape): 90.24,15.1 89.68,14.53 89.54,14.47 89.39,14.53 88.83,15.1 89.34,15.29 89.74,15.29
GND on BOTTOM: 88.9,58.42 88.53,59.32 87.63,59.69 83.82,59.69 82.92,59.32 82.55,58.42 82.55,48.26 82.92,47.36 83.82,46.99 87.63,46.99 88.53,47.36 88.9,48.26
#RES on BOTTOM (solid shape): 110.72,27.68 110.35,27.34 110.28,27.33 110.22,27.34 109.86,27.68 110.28,28.62
#RES on BOTTOM (solid shape): 96.17,31.26 96.23,31.12 96.17,30.97 95.78,30.59 95.2,31.12 95.78,31.64
#RES on BOTTOM (solid shape): 110.06,26.41 110.36,26.3 109.76,25.36 109.16,26.3 109.48,26.41 109.74,26.63 109.78,26.63 109.82,26.63
+5B_USB on BOTTOM (solid shape): 101.65,12.8 100.95,12.09 100.28,12.69 100.24,12.8 100.28,12.92 100.95,13.52
A on BOTTOM (solid shape): 19.95,29.68 19.49,29.6 19.09,29.35 19.06,29.35 19.04,29.35 18.63,29.6 18.15,29.68 19.05,30.32
B on BOTTOM (solid shape): 17.41,29.68 16.95,29.6 16.55,29.35 16.52,29.35 16.5,29.35 16.09,29.6 15.61,29.68 16.51,30.32
C on BOTTOM (solid shape): 74.8,28.94 74.56,28.82 74.38,28.62 74.34,28.62 74.29,28.62 73.98,28.85 73.6,28.94 74.19,29.89
C on BOTTOM (solid shape): 74.24,29.87 73.6,28.94 73.47,29.11 73.29,29.22 73.28,29.26 73.28,29.3 73.58,29.99 73.6,30.74
C on BOTTOM (solid shape): 32.65,29.68 32.19,29.6 31.79,29.35 31.76,29.35 31.74,29.35 31.33,29.6 30.85,29.68 31.75,30.32
D on BOTTOM (solid shape): 30.11,29.68 29.65,29.6 29.25,29.35 29.22,29.35 29.2,29.35 28.79,29.6 28.31,29.68 29.21,30.32
D+ on BOTTOM (solid shape): 107.84,14.14 107.95,14.17 108.06,14.14 108.7,13.5 107.95,12.86 107.2,13.5
D- on BOTTOM (solid shape): 104.67,14.07 104.78,14.1 104.88,14.07 105.45,13.5 104.78,12.86 104.1,13.5
DIG1 on BOTTOM (solid shape): 35.19,29.68 34.73,29.6 34.33,29.35 34.3,29.35 34.28,29.35 33.87,29.6 33.39,29.68 34.29,30.32
DIG3 on BOTTOM (solid shape): 40.12,29.68 39.48,29.04 39.37,29.01 39.26,29.04 38.62,29.68 39.37,30.32
DP on BOTTOM (solid shape): 14.87,29.68 14.41,29.6 14.01,29.35 13.98,29.35 13.96,29.35 13.55,29.6 13.07,29.68 13.97,30.32
E on BOTTOM (solid shape): 27.57,29.68 27.11,29.6 26.71,29.35 26.68,29.35 26.66,29.35 26.25,29.6 25.77,29.68 26.67,30.32
F on BOTTOM (solid shape): 22.49,29.68 22.03,29.6 21.63,29.35 21.6,29.35 21.58,29.35 21.17,29.6 20.69,29.68 21.59,30.32
G on BOTTOM (solid shape): 25.03,29.68 24.57,29.6 24.17,29.35 24.14,29.35 24.12,29.35 23.71,29.6 23.23,29.68 24.13,30.32
MISO/DIG2 on BOTTOM (solid shape): 83.87,33.66 83.29,33.12 82.9,33.51 82.84,33.66 82.9,33.8 83.29,34.19
MISO/DIG2 on BOTTOM (solid shape): 37.73,29.68 37.27,29.6 36.87,29.35 36.84,29.35 36.82,29.35 36.41,29.6 35.93,29.68 36.83,30.32
SCLK on BOTTOM (solid shape): 82.83,31.89 82.89,31.75 82.83,31.61 82.45,31.22 81.87,31.75 82.45,32.28
N439914 on BOTTOM (solid shape): 105.28,9.36 104.86,8.95 104.78,8.93 104.69,8.95 104.27,9.36 104.78,10
N441096 on BOTTOM (solid shape): 99,26.67 98.25,25.77 98.17,26.25 97.92,26.66 97.92,26.69 97.92,26.71 98.17,27.11 98.25,27.57
N443077 on BOTTOM (solid shape): 32.35,36.23 31.89,35.77 31.75,35.71 31.61,35.77 31.15,36.23 31.75,36.88
N443081 on BOTTOM (solid shape): 29.81,36.23 29.35,35.77 29.21,35.71 29.07,35.77 28.61,36.23 29.21,36.88
N443107 on BOTTOM (solid shape): 26.72,39.37 26.07,38.77 25.61,39.23 25.55,39.37 25.61,39.51 26.07,39.97
N443119 on BOTTOM (solid shape): 29.07,40.43 29.21,40.49 29.35,40.43 29.81,39.97 29.21,39.32 28.61,39.97
N445591 on BOTTOM (solid shape): 42.51,36.23 42.05,35.77 41.91,35.71 41.77,35.77 41.31,36.23 41.91,36.88
N445610 on BOTTOM (solid shape): 39.97,36.23 39.51,35.77 39.37,35.71 39.23,35.77 38.77,36.23 39.37,36.88
N445622 on BOTTOM (solid shape): 37.43,36.23 36.97,35.77 36.83,35.71 36.69,35.77 36.23,36.23 36.83,36.88
N446825 on BOTTOM: 29.21,54.61 28.31,54.98 27.94,55.88 27.94,58.42 28.31,59.31 29.19,59.69 30.1,59.32 30.48,58.42 30.85,57.52 31.75,57.15 45.72,57.15 46.62,56.78 46.99,55.88 46.62,54.98 45.72,54.61
N464057 on BOTTOM (solid shape): 123.24,11.43 122.52,10.76 121.99,11.29 121.93,11.43 121.99,11.57 122.52,12.1
N464124 on BOTTOM (solid shape): 123.24,21.59 122.52,20.92 121.99,21.45 121.93,21.59 121.99,21.73 122.52,22.26
N464128 on BOTTOM (solid shape): 123.24,31.75 122.52,31.08 121.99,31.61 121.93,31.75 121.99,31.89 122.52,32.42
N467678 on BOTTOM (solid shape): 74.25,38.74 73.6,38.13 73.1,38.64 73.07,38.74 73.1,38.84 73.6,39.35
N467714 on BOTTOM (solid shape): 81.12,38.73 80.48,38.12 79.97,38.64 79.95,38.73 79.97,38.83 80.48,39.34
N470630 on BOTTOM (solid shape): 92.2,16.53 92.31,16.56 92.43,16.53 92.92,15.96 92.31,15.19 91.72,15.96
N470630 on BOTTOM (solid shape): 92.03,17.78 91.45,17.25 91.06,17.64 91,17.78 91.06,17.92 91.45,18.31
N470646 on BOTTOM (solid shape): 86.64,16.53 86.76,16.56 86.87,16.53 87.36,15.96 86.76,15.19 86.16,15.96
N470646 on BOTTOM (solid shape): 88.01,17.92 88.07,17.78 88.01,17.64 87.62,17.25 87.05,17.78 87.62,18.31
N473598 on BOTTOM (solid shape): 34.89,36.23 34.43,35.77 34.29,35.71 34.15,35.77 33.69,36.23 34.29,36.88
N479390 on BOTTOM: 74.93,48.26 75.3,47.36 76.2,46.99 80.01,46.99 80.91,47.36 81.28,48.26 81.28,58.42 80.91,59.32 80.01,59.69 76.2,59.69 75.3,59.32 74.93,58.42

Small or netless copper shapes (teardrops, artwork), in the pictures only: 13 on BOTTOM
